# Altium PCB Layout.PcbDoc
Units mil, origin at the board's own origin, x right, y up, seen from the top; angles counter-clockwise.
Board outline 3937.01 x 492.13 mil, 2 copper layers (Top Layer, Bottom Layer), stack 61.855 mil thick; 52 components, 45 nets, 184 pads, 73 vias.
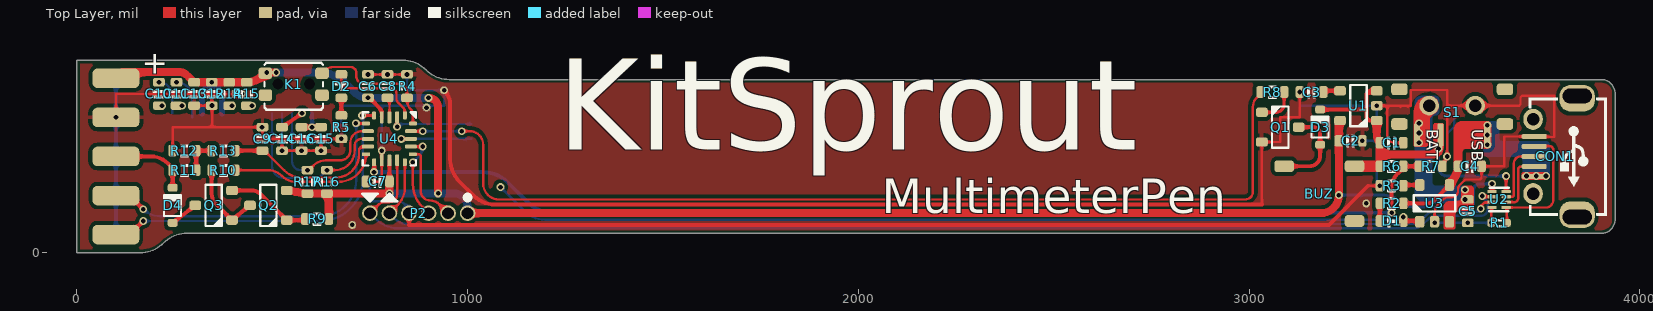
[diagram p0: Top Layer view]
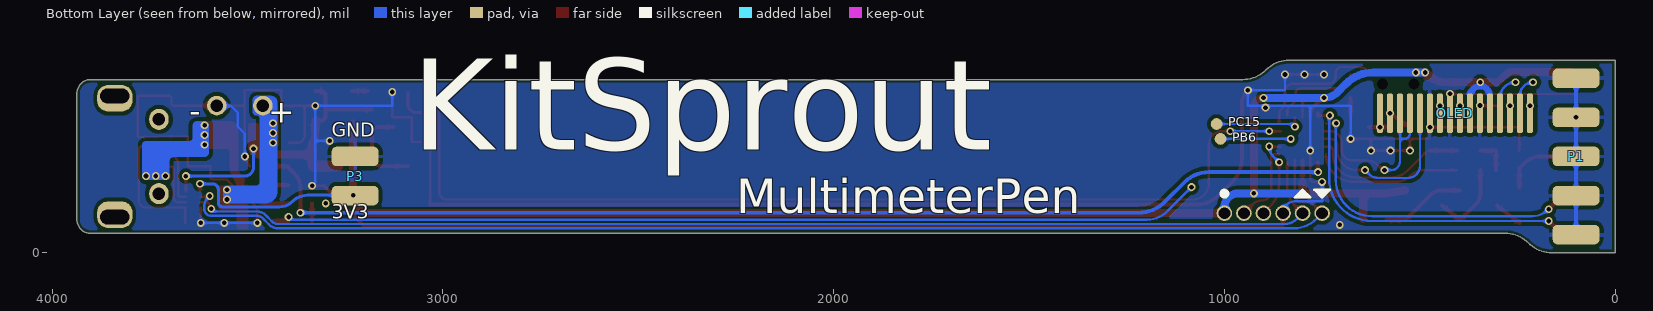
[diagram p1: Bottom Layer view, seen from below]
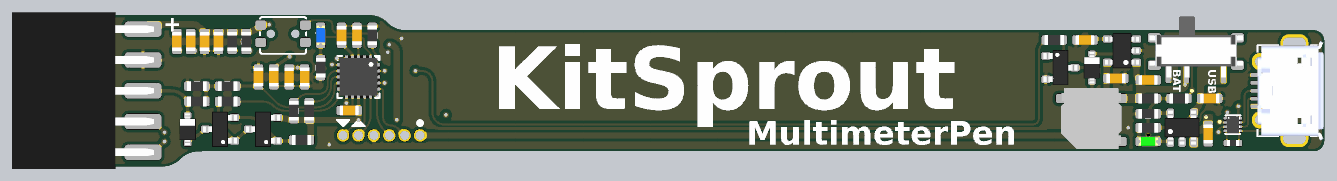
[diagram p2: 3D render of the assembled board from above, using the file's embedded part models]

## Layer stack, top to bottom
Top Solder: solder mask 0.4, Solder Resist, Dk 3.5
Top Layer: signal copper 1.4
Dielectric 1: dielectric 59.0551, FR-4, Dk 4.8
Bottom Layer: signal copper 1.4
Bottom Solder: solder mask 0.4, Solder Resist, Dk 3.5

## Board outline
0,0 0,492.13 834.34,492.13 cw(c834.34,408.11) 893.75,467.52 ccw(c953.15,526.92) 953.15,442.91 3901.57,442.91 cw(c3901.57,407.48) 3937.01,407.48 3937.01,84.65 cw(c3901.57,84.65) 3901.57,49.21 281.26,49.21 ccw(c281.26,-34.8) 221.85,24.61 cw(c162.45,84.01) 162.45,0

## Design rules (kind name [scope] priority, off if disabled: settings)
BoardOutlineClearance [All] p1: gap=10 ignorepadtopadclearanceinfootprint=FALSE except(0: Arc-SplitContinuation Track-OutlineEdge Track-SplitContinuation SMDPad-SplitContinuation THPad-SplitContinuation Via-SplitContinuation Fill-SplitContinuation Poly-SplitContinuation Region-SplitContinuation Text-SplitContinuation; 8: Arc-OutlineEdge SMDPad-OutlineEdge THPad-OutlineEdge Via-OutlineEdge Fill-OutlineEdge Poly-OutlineEdge Region-OutlineEdge Text-OutlineEdge)
Clearance ClearancePolygon [InPolygon] p1: gap=10 ignorepadtopadclearanceinfootprint=FALSE except(0: Arc-Hole Track-Hole SMDPad-Hole THPad-Hole Via-Hole Fill-Hole Poly-Hole Region-Hole Text-Hole)
Clearance [All] p2: gap=5 ignorepadtopadclearanceinfootprint=FALSE except(0: Arc-Hole Track-Hole SMDPad-Hole THPad-Hole Via-Hole Fill-Hole Poly-Hole Region-Hole Text-Hole)
ComponentClearance [All] p1: gap=0 collisioncheckmode=3 verticalgap=0 showdistances=FALSE
DiffPairsRouting [All] p1: maxlimit=10 minlimit=10 mostfreqgap=10 toplayer_minwidth=6 toplayer_maxwidth=15 toplayer_prefwidth=15 bottomlayer_minwidth=6 bottomlayer_maxwidth=15 bottomlayer_prefwidth=15 maxuncoupledlength=500
Height [All] p1: minheight=0 maxheight=5000 prefheight=500
HoleSize [All] p1: absolutevalues=TRUE maxlimit=200 minlimit=1 maxpercent=80.000 minpercent=20.000
HoleToHoleClearance [All] p1: gap=6 allowstackedmicrovias=TRUE
MinimumAnnularRing [All] p1: minimumring=4
MinimumSolderMaskSliver [All] p1: minsoldermaskwidth=0
PlaneConnect [All] p1: pad.planeconnectstyle=Relief pad.reliefexpansion=20 pad.reliefentries=4 pad.reliefconductorwidth=10 pad.reliefairgap=10 via.planeconnectstyle=Direct via.reliefexpansion=20 via.reliefentries=4 via.reliefconductorwidth=10 via.reliefairgap=10
PolygonConnect [All] p1: thpad.connectstyle=Relief thpad.reliefconductorwidth=10 thpad.reliefentries=4 thpad.polygonreliefangle="90 Angle" thpad.airgapwidth=10 smdpad.connectstyle=Relief smdpad.reliefconductorwidth=10 smdpad.reliefentries=4 smdpad.polygonreliefangle="90 Angle" smdpad.airgapwidth=10 via.connectstyle=Direct via.reliefconductorwidth=10 via.reliefentries=4 via.polygonreliefangle="90 Angle" via.airgapwidth=10
RoutingVias [All] p1: holewidth=12 width=24 viastyle="Through Hole" minholewidth=12 minwidth=20 maxholewidth=28 maxwidth=50
SMDEntry [All] p1: side=TRUE corner=TRUE anyangle=TRUE
SMDToCorner [All] p1: distance=0
SMDToPlane [All] p1: distance=0
SilkToSilkClearance [All] p1: silktosilkclearance=0
SilkToSolderMaskClearance [IsPad] p1: minsilkscreentomaskgap=0 clearancetoexposedcopper=TRUE
SolderMaskExpansion [All] p1: expansion=2 istentingtop=FALSE
UnRoutedNet [All] p1: checkbadconnections=TRUE
Width [All] p1: maxlimit=500 minlimit=6 preferedwidth=10
20 further rules are at their usual default settings.

## Components (designator, comment, footprint, x,y, rotation, side; value= is the part's Value field where it differs from the comment)
BUZ "Buzzer" Buzzer_5x5 3180,156.06 r90 top locked
C1 "C0603" CAP_0603 3365,281.06 r180 top value=1uF
C2 "C0603" CAP_0603 3260,286.06 r180 top value=1uF
C3 "C0603" CAP_0603 3160,411.06 r0 top value=22nF
C4 "C0603" CAP_0603 3565,221.06 r180 top value=1uF
C5 "C0603" CAP_0603 3560,106.06 r90 top value=1uF
C6 "C0603" CAP_0603 745,426.06 r270 top value=0.1uF
C7 "C0603" CAP_0603 770,182.06 r0 top value=0.1uF
C8 "C0603" CAP_0603 795,426.06 r270 top value=0.1uF
C9 "C0603" CAP_0603 475,291.06 r270 top value=Filter
C10 "C0603" CAP_0603 210,406.06 r270 top value=1uF
C11 "C0603" CAP_0603 255,406.06 r270 top value=1uF
C12 "C0603" CAP_0603 345,406.06 r90 top value=4.7uF
C13 "C0603" CAP_0603 300,406.06 r90 top value=0.1uF
C14 "C0603" CAP_0603 525,291.06 r90 top value=2.2uF
C15 "C0603" CAP_0603 625,291.06 r90 top value=4.7uF
C16 "C0603" CAP_0603 575,291.06 r90 top value=0.1uF
CON1 "MicroUSB" USB_Micro-AB 3830,246.06 r270 top locked value="Type B"
D1 "D0603" LED_0603_GREEN 3365,81.06 r0 top value=GREEN
D2 "D0603" LED_0603_BLUE 677,426.06 r270 top value=BLUE
D3 "1N4148" SOD-323 3182,321.06 r90 top
D4 "1N4148" SOD-323 245,121.06 r90 top
K1 "TACT" ButtonTACT_3.4*3.5_90 555,431.06 r0 top value=3.4x3.5mm
OLED "OLED_0.42_SSD1306" OLED_0.42_72x40_SSD1306_Bottom 410,336.06 r0 top locked value="0.42\" 72x40"
P1 "HDR2x5" HDR2X5_2.54_180HF 100,446.06 r180 bottom locked
P2 "HDR1x6" HDR1X6_1.27_180F 1000,101.06 r270 top locked value=1.27
P3 "HDR1x2" HDR1X2_2.54_180H 3225,146.06 r0 bottom value=2.54
Q1 "2N2222" SOT23-3 3080,321.06 r0 top
Q2 "SS8550" SOT23-3 490,121.06 r180 top
Q3 "SS8550" SOT23-3 350,121.06 r180 top
R1 "R0402" RES_0402 3640,76.06 r0 top value=10K
R2 "R0603" RES_0603 3365,126.06 r0 top value=1K
R3 "R0603" RES_0603 3365,171.06 r0 top value=2K
R4 "R0603" RES_0603 845,426.06 r270 top value=10K
R5 "R0603" RES_0603 677,321.06 r90 top value=10K
R6 "R0603" RES_0603 3365,221.06 r180 top value=10K
R7 "R0603" RES_0603 3465,221.06 r180 top value=10K
R8 "R0603" RES_0603 3060,411.06 r180 top value=2.2K
R9 "R0603" RES_0603 615,86.06 r0 top value=100R
R10 "R0603" RES_0603 375,211.06 r180 top value=2.2K
R11 "R0603" RES_0603 275,211.06 r180 top value=15K
R12 "R0603" RES_0603 275,261.06 r0 top value=2K
R13 "R0603" RES_0603 375,261.06 r180 top value=0R
R14 "R0603" RES_0603 390,406.06 r90 top value=10K
R15 "R0603" RES_0603 435,406.06 r90 top value=10K
R16 "R0603" RES_0603 640,181.06 r270 top value=4.7K
R17 "R0603" RES_0603 590,181.06 r270 top value=4.7K
S1 "SPDT" SwitchSPDT_2.8X6.6_90 3520,376.06 r180 top locked value=2.8x6.6mm
U1 "RT9193-33GB" SOT23-5 3280,376.06 r180 top value=3V3
U2 "TXS0102" SON_P0.35_8 3640,136.06 r0 top value=2-Bit
U3 "LTC4054" SOT23-5 3475,126.06 r90 top
U4 "STM32L011F4U6" QFN_P0.5_20 800,291.06 r270 top value=32MHz

## Footprints (in the part's own frame and the unit in brackets; to place one, negate y for a bottom-side part, rotate by r counter-clockwise, add the part's x,y. Pads: shape width x height; smd on the part's side, far side on the other; paste and mask are expansions set on the pad)
ButtonTACT_3.4*3.5_90 [mil]
  round 20 hole 28 unplated: 0(-40,0) 0(40,0)
  rrect50% 35x30 smd: 1(-72.5,28) 2(72.5,28) 3(-72.5,-28) NC(72.5,-28)
  silkscreen extent -75,-65 75,55
Buzzer_5x5 [mil]
  rrect50% 30x50 smd: N(65,90) NC(-75,-90) P(65,-90)
  body extent -98,-98 98,98, height 106
CAP_0603 [mil]
  rrect50% 22x30 smd: 1(-30,0) 2(30,0)
  silkscreen extent -10,-15 10,15, body extent -31,-16 31,16, height 31
HDR1X2_2.54_180H [mil]
  rrect50% 120x50 smd: 1(0,0) 2(0,-100)
  body extent -35,-150 406,50, height 61
HDR1X6_1.27_180F [mil]
  round 40 hole 30: 1(0,0) 2(0,-50) 3(0,-100) 4(0,-150) 5(0,-200) 6(0,-250)
HDR2X5_2.54_180HF [mil]
  rrect50% 120x50 smd: 1(0,0) 3(0,-100) 5(0,-200) 7(0,-300) 9(0,-400)
  rrect50% 120x50 smd far side: 2(0,0) 4(0,-100) 6(0,-200) 8(0,-300) 10(0,-400)
  body extent -36,-455 425,55, height 76
LED_0603_BLUE [mil]
  rrect50% 22x30 smd: 1(-30,0) 2(30,0)
  silkscreen extent -10,-16 10,16, body extent -32,-16 32,16, height 24
LED_0603_GREEN [mil]
  rrect50% 22x30 smd: 1(-30,0) 2(30,0)
  silkscreen extent -10,-16 10,16, body extent -32,-16 32,16, height 24
OLED_0.42_72x40_SSD1306_Bottom [mil]
  rrect50% 16x100 smd far side: 1(-191.93,20.63) 2(-166.34,20.63) 3(-140.75,20.63) 4(-115.16,20.63) 5(-89.57,20.63) 6(-63.98,20.63) 7(-38.39,20.63) 8(-12.8,20.63) 9(12.8,20.63) 10(38.39,20.63) 11(63.98,20.63) 12(89.57,20.63) 13(115.16,20.63) 14(140.75,20.63) 15(166.34,20.63) 16(191.93,20.63)
  body extent -236,-285 236,148, height 83
QFN_P0.5_20 [mil] "QFN, 20-Leads, Body 3.00x3.00mm, Pitch 0.50mm, IPC High Density"
  rrect50% 20x10 smd: 1(-60,39.37) 5(-60,-39.37) 11(60,-39.37) 15(60,39.37)
  rrect50% 30x10 smd: 2(-55,19.69) 3(-55,0) 4(-55,-19.69) 12(55,-19.69) 13(55,0) 14(55,19.69)
  rrect50% 10x20 smd: 6(-39.37,-60) 10(39.37,-60) 16(39.37,60) 20(-39.37,60)
  rrect50% 10x30 smd: 7(-19.69,-55) 8(0,-55) 9(19.68,-55) 17(19.68,55) 18(0,55) 19(-19.69,55)
  Top Layer region: -39.37,-60
  silkscreen extent -68,-68 68,68, body extent -61,-61 61,61, height 24
RES_0402 [mil]
  rrect50% 20x20 smd: 1(-20,0) 2(20,0)
  silkscreen extent -6,-10 7,10, body extent -20,-10 20,10, height 14
RES_0603 [mil]
  rrect50% 22x30 smd: 1(-30,0) 2(30,0)
  silkscreen extent -10,-16 10,16, body extent -31,-16 31,16, height 18
SOD-323 [mil]
  rrect50% 20x25 smd: 1(-45,0) 2(45,0)
  silkscreen extent -27,-22 27,22, body extent -51,-27 51,27, height 43
SON_P0.35_8 [mil] "SON, 8-Leads, Body 1.40x1.00mm, Pitch 0.35mm, IPC High Density"
  rrect50% 24x8 smd: 1(-18,20.67) 2(-18,6.89) 3(-18,-6.89) 4(-18,-20.67) 5(18,-20.67) 6(18,-6.89) 7(18,6.89) 8(18,20.67)
  Top Layer region: -18,20.67
  silkscreen extent -25,-30 25,30, body extent -23,-29 23,29, height 16
SOT23-3 [mil]
  rrect50% 30x24 smd: 1(-47,38) 2(-47,-38) 3(47,0)
  silkscreen extent -21,-53 21,53, body extent -55,-57 55,57, height 51
SOT23-5 [mil]
  rrect50% 30x24 smd: 1(-47,38) 2(-47,0) 3(-47,-38) 4(47,-38) 5(47,38)
  silkscreen extent -21,-53 21,53, body extent -55,-57 55,57, height 57
SwitchSPDT_2.8X6.6_90 [mil]
  rrect50% 42x30 smd: 0(-135,-42) 0(-135,47) 0(135,-42) 0(135,47)
  round 50 hole 32: 0(-59.06,0) 0(59.06,0)
  rrect50% 16x60 smd: 1(90,75) 2(30,75) 3(-90,75)
  body extent -152,-111 151,86, height 55
USB_Micro-AB [mil]
  rrect80% 68x90 hole 37 slot 75 at 90 deg copper offset 6,0 mask+0: 0(-155,10)
  oval 54x50 hole 32 mask+0: 0(-95,-103) 0(95,-103)
  rrect80% 68x90 hole 37 slot 75 at 90 deg copper offset -6,0 mask+0: 0(155,10)
  rrect50% 12x64 smd: 1(51.18,-100) 2(25.59,-100) 3(0,-100) 4(-25.59,-100) 5(-51.18,-100)
  silkscreen extent -151,-113 151,86, body extent -161,-109 161,104, height 108

## Part data
C1 C2 C3 C4 C5 C6 C7 C8 C9 C10 C11 C12 C13 C14 C15 C16: library part Cap_0603, "Capacitor", Note=±10%, Specification="X7R, ±10%, 16V", Type=0603
CON1: library part USB_Micro, "USB"
D1 D2: library part LED_0603, "LED", Type=0603
D3 D4: library part Diode_SOD323, "Diode", Type=SOD323
K1: library part ButtonTACT_90_3.4x3.5, "Button", Link=https://item.taobao.com/item.htm?spm=a1z0d.6639537.1997196601.53.23d65886vmE4xA&id=524943251643, Type="TACT 4P"
OLED: "OLED", Link=https://item.taobao.com/item.htm?spm=a1z09.2.0.0.4fdb2e8dEz3Swn&id=556201228621&_u=ik3v2nv8c8e, Note=SSD1306, Specification=0.65mm, Type=FPC16
P1: library part HDR2x5_2.54, "Header"
P2: library part HDR1x6_1.27T, "Header", Type="DIP 1x6"
P3: library part HDR1x2_2.54, "Header", Type="DIP 1x2"
Q1: library part BJT_NPN, "Transistor", Note=NPN, Type=SOT32-3
Q2: library part BJT_PNP, "Transistor", Note=PNP, Type=SOT32-3
Q3: library part BJT_PNP_T, "Transistor", Note=PNP, Type=SOT32-3
R1: library part Res_0402, "Resistor", Note=±1%, Specification=±1%, Type=0402
R2 R3 R4 R5 R6 R7 R8 R9 R10 R11 R12 R13 R14 R15 R16 R17: library part Res_0603, "Resistor", Note=±1%, Specification=±1%, Type=0603
S1: library part SwitchSPDT_90_2.8x6.6, "Switch", Type="SPDT 3P"
U1: library part RT9193, "Power", Type=SOT23-5
U2: "Level Shifter", Manufacturer="Texas Instruments", ComponentLink1Description=Datasheet, ComponentLink1URL=https://www.ti.com/lit/ds/symlink/txs0102.pdf?&ts=1589954619766, Type=SON8
U3: "Battery Charger", Type=SOT23-5
U4: library part STM32L011F, "MCU ST", Manufacturer=STMicroelectronics, Datasheet=https://www.st.com/resource/en/datasheet/stm32f030f4.pdf, Note=CortexM0, Specification="16K Flash,2K SRAM", Type=TSSOP20
BUZ: Link=https://item.taobao.com/item.htm?spm=a1z0d.6639537.1997196601.13.23d65886vmE4xA&id=599696064098, Type=SMD3

## Free pads (board coordinates)
  round 30 smd far side: 2(1010,291.06) 2(1020,329.06)

## Via types
v1: diameter 20, hole 12, Top Layer to Bottom Layer, tented both sides, 73 vias

## Nets (pads, with @x,y where several pads share a name; then routed paths per layer and width w, separated by ;. In a path a pad name is that pad's centre, name@x,y a point inside that pad or via, vN(x,y) a via of type N, cw(c..) or ccw(c..) an arc to the next point about the centre after c; other vN are vias at no path point)
+3V3: C2.2 C6.2 C7.2 C12.2 C13.2 K1.1 OLED.5 OLED.7 P1.2 P2.1 P3.1 Q2.2 R9.2 R14.2 R15.2 R16.2 R17.2 U1.5 U2.1 U4.4 U4.13 | length 4938.9
  Top Layer w8: C7.2@800,181.06 C7.2 ; U2.1 v1@3622,181.73
  Top Layer w10: v1(745,396.06) 749,396.06 773.5,371.56 cw(c757.05,355.11) 780.31,355.11 U4.4 ; C7.2 U4.13
  Top Layer w20: P1.2 116,462.06 264.5,462.06 cw(c264.5,441.56) 278.1,456.9 287,449.06 C13.2 v1(345,436.06) R14.2 R15.2 ccw(c435,495.21) 476.82,453.39 K1.1 482.5,461.06 v1(486.25,461.06) v1(510,461.06) ; Q2.2@539,161.06 Q2.2 R17.2 ; R17.2@590,151.14 799.92,151.14 v1(800,151.06) C7.2@800,181.06 ; R16.2 644.92,146.14 R9.2@644.92,86.06 ; v1(900,396.06) cw(c900,371.56) 924.5,371.56 v1(924.5,151.56) ; P2.1 3184,101.06 ccw(c3184,147.06) v1(3230,147.06) C2.2 U1.5@3230,330.82
  Bottom Layer w8: v1(3230,147.06) 3346.58,147.06 cw(c3346.58,92.92) 3384.81,131.25 3384.91,131.15 ccw(c3419,165.35) 3419,117.06 3427.29,117.06 3556.73,117.06 3560.87,117.06 3564.64,117.06 ccw(c3564.64,127.43) 3575,127.43 3575,161.06 cw(c3590,161.06) 3590,176.06 v1(3622,176.06)
  Bottom Layer w16: OLED.5 320.43,401.5 cw(c345,401.5) 345,426.06 ; v1(345,436.06) 345,426.06 ; OLED.7 371.61,399.45 ccw(c345,399.45) 345,426.06
  Bottom Layer w20: v1(486.25,461.06) v1(510,461.06) 618.58,461.06 cw(c618.58,361.06) 689.29,431.77 710.15,410.91 ccw(c746,446.76) 746,396.06 v1(900,396.06) ; v1(800,151.06) 800.5,151.56 v1(924.5,151.56) 964.5,151.56 cw(c964.5,116.06) 1000,116.06 P2.1
+VBAT: C5.2 S1.0@3460.94,376.06 S1.1 U3.3 | length 143.6
  Top Layer w10: S1.1 3430,345.12 S1.0@3460.94,376.06
  Bottom Layer w10: v1(3435,331.06) 3436.91,332.98 3436.91,343.53 3460.94,367.56 S1.0@3460.94,376.06
  other v1: 3553,136.06 3553,161.06 3435,281.06 3435,306.06
+VBUS: C4.2 CON1.1 R2.2 S1.3 U3.4 | length 374.8
  Top Layer w10: R2.2 3456.1,126.06 ccw(c3456.1,149.96) 3473,133.06 U3.4 ; v1(3610,276.06) v1(3610,301.06)
  Top Layer w20: U3.4@3517.97,181.04 ccw(c3476.06,223.06) 3535.35,220.23 ccw(c3476.06,223.06) C4.2@3535.41,223.06 ; C4.2 C4.2@3535.41,220.06
  Bottom Layer w10: v1@3611.91,274.15 3691.91,274.15 3710,256.06 v1(3710,196.06)
  other v1: 3735,196.06 3760,196.06 3610,326.06
+VIN: BUZ.P C1.2 D3.2 R6.2 S1.2 U1.1 U1.3 U2.8 | length 826.1
  Top Layer w8: U2.8 v1(3658,195.73)
  Top Layer w10: D3.2 3300,366.06 ; U1.1 3311.88,338.06 cw(c3311.88,349.37) 3300.58,349.37 3300.58,401.64 cw(c3313,401.64) 3313,414.06 U1.3
  Top Layer w20: U1.1 3327,300.38 ccw(c3354.31,300.38) C1.2 3335,251.06 ; R6.2 3335,251.06 ; 3469,251.06 3335,251.06
  Top Layer w28: BUZ.P R6.2@3332,221.06
  Bottom Layer w8: v1(3484.93,266.13) 3484.93,218.36 ccw(c3507.56,218.36) 3507.56,195.73 v1(3658,195.73) ; v1@3487.93,267.13 v1@3489,266.06
BATT: R6.1 R7.2 U4.11 | length 2826.8
  Top Layer w10: v1(760.63,206.06) U4.11 ; v1@3365,105.06 3365,165.85 cw(c3416.21,165.85) 3379.99,202.05 R6.1@3395,217.06 ; R6.1 R7.2
  Bottom Layer w10: v1(760.63,206.06) 1040,206.06 cw(c1040,119.15) 1101.46,180.61 1151.72,130.35 ccw(c1220,198.63) 1220,102.06 v1(3365,102.06)
D+: CON1.2 U2.6 | length 156
  Top Layer w6: U2.6 3678.81,129.17 ccw(c3678.81,139.36) 3689,139.36 3689,213.55 cw(c3695.92,213.55) 3695.92,220.47 CON1.2
D-: CON1.3 U2.7 | length 165.9
  Top Layer w6: U2.7 3673.49,142.95 ccw(c3673.49,147.47) 3678,147.47 3678,229.06 cw(c3695,229.06) 3695,246.06 CON1.3
GND: C1.1 C2.1 C3.1 C4.1 C5.1 C6.1 C7.1 C8.1 C9.1 C12.1 C13.1 C14.1 C15.1 C16.1 CON1.5 OLED.6 OLED.9 OLED.11 P1.1 P1.3 P1.4 P1.5 P1.7 P1.9 P2.4 P3.2 Q1.2 R1.1 R3.1 R4.1 R5.1 R7.1 R12.1 S1.0@3579.06,376.06 U1.2 U2.4 U3.2 U4.12 | length 10158.5
  Top Layer w6: v1(100,346.06) 100,406.06 345,406.06 ; R12.1 245,321.06 346.02,321.06 ; C13.1 C12.1 345,406.06 ; C12.1@346.02,376.06 346.02,321.06 ; v1@422.8,406.06 345,406.06 ; v1(473.98,321.06) 346.02,321.06 ; C9.1 475,291.06 525,291.06 ; R5.1@680,291.06 v1(677,291.06) 625,291.06 ; C7.1@740,181.06 v1(750,181.06) 772,181.06 ccw(c772,189.38) 780.31,189.38 U4.12 v1(780.31,261.06) ; v1(745,456.06) v1(795,456.06) v1(845,456.06) ; 850,71.06 P2.4 ; 3033,123.06 Q1.2 3080,283.06 3080,346.06 3130,346.06 v1(3130,411.06) ; 3305,171.06 v1(3335,171.06) ; v1(3327,376.06) 3354,376.06 ; C1.1 3373.31,281.06 cw(c3373.31,300.38) 3354,300.38 3354,376.06 ; U3.2 3475,99.89 cw(c3510.42,99.89) 3485.35,124.91 ; 3485.37,124.94 3495.75,135.31 cw(c3512.04,119.02) 3512.04,142.06 3519.12,142.06 ccw(c3519.12,157.91) 3534.97,157.91 3534.97,163.2 cw(c3547.74,163.2) 3538.71,172.24 3553.54,187.06 3591.49,187.06 3595,190.58 C4.1 3653,221.06 3653,297.24 CON1.5 3730,296.06 3781,296.06 3781,401.06 3698.51,401.06 3695,397.55 3695,379.58 3691.49,376.06 3579.06,376.06 3507,376.06 ; R7.1 v1(3507,246.06) 3507,376.06 ; v1(3620,76.06) U2.4@3620,115.39 ; 525,291.06 625,291.06 ; 525,291.06 v1(525,261.06) v1(575,261.06) v1(625,261.06) 625,291.06 ; 3354,376.06 3414,376.06 3414,416.06 3507,416.06 3507,376.06
  Top Layer w10: 850,71.06 3205,71.06 3305,171.06 ; v1(940,415.75) cw(c903.79,379.53) 955,379.53 955,241.06 ccw(c1039.5,241.06) 979.72,181.34 ; 979.75,181.31 1015,146.06 ccw(c1070.53,201.59) 1070.5,123.06 ; 1070.53,123.06 1075,123.06 3033,123.06
  Bottom Layer w6: v1(677,291.06) 677,376.06 780.31,376.06 ; v1(750,181.06) 750,131.06 820,131.06 cw(c820,101.06) P2.4 ; v1(780.31,261.06) 780.31,376.06 ; v1(845,456.06) 845,415.75 v1(940,415.75) 940,376.06 780.31,376.06 ; v1(3130,411.06) 3130,376.06 v1(3327,376.06) 3327,286.06 ; v1(3290,286.06) 3327,286.06 ; v1(3335,171.06) 3327,179.06 3327,286.06 ; v1(3475,76.06) v1(3560,76.06) v1(3620,76.06) ; v1(3507,246.06) 3507,304.01 3525.01,322.02 3525.01,358.05 3542.1,375.14 3578.13,375.14 S1.0@3579.06,376.06
  Bottom Layer w10: P1.9 P1.7 P1.5 v1(100,346.06) P1.1 ; P2.4@850,96.06 P2.4
  other v1: 705,71.06 3300,126.06 895,371.06 346.02,376.69 422.8,406.69
ID: CON1.4 R1.2 U2.5 | length 353.2
  Top Layer w6: U2.5 3759.33,115.39 ccw(c3759.33,135.06) 3779,135.06 3779,262.06 ccw(c3768,262.06) 3768,273.06 3733.9,273.06 ccw(c3733.86,267.06) CON1.4 ; R1.2 U2.5@3660,114.39
KEY: K1.2 R4.2 U4.20 | length 348
  Top Layer w6: K1.2 635.37,466.93 cw(c655,447.3) 643.51,472.57 cw(c655,447.3) 655,475.06 700.09,475.06 cw(c700.09,460.15) 715,460.15 715,452.06 ccw(c735,452.06) 735,432.06 770,432.06 824.98,432.06 cw(c824.98,412.04) 845,412.04 R4.2 845,390.21 ccw(c879.14,390.21) 855,366.06 cw(c842.93,353.99) 860,353.99 U4.20
LED: D2.1 U4.1 | length 241.9
  Top Layer w6: D2.1 677,440.32 ccw(c696.33,440.32) 695.84,420.99 ; 703.84,420.99 ccw(c704.33,440.32) 704.33,420.99 698.84,420.99 804.71,420.44 804.77,420.44 cw(c804.71,407.15) 818,407.15 818,395.11 ccw(c835.01,395.11) 822.98,383.08 835,371.06 cw(c824.45,360.51) 839.37,360.51 U4.1
NetBUZ_N: BUZ.N D3.1 Q1.3 | length 228.1
  Top Layer w10: BUZ.N 3155,221.06 ccw(c3155,248.06) 3182,248.06 D3.1 3182,304.06 ccw(c3165,304.06) 3165,321.06 Q1.3
NetC3_2: C3.2 U1.4 | length 40
  Top Layer w10: C3.2@3193,414.06 U1.4
NetC10_1: C10.1 OLED.2 | length 98.6
  Bottom Layer w6: v1(210,436.06) cw(c210,402.4) 243.66,402.4 OLED.2
NetC10_2: C10.2 OLED.1
  other v1: 218.07,376.06
NetC11_1: C11.1 OLED.4 | length 112.1
  Bottom Layer w6: v1(255,436.06) cw(c255,396.22) 256.9,436.02 cw(c255,396.22) 294.8,398.12 cw(c255,396.22) 294.84,396.22 OLED.4 OLED.4@294.84,346.69
NetC11_2: C11.2 OLED.3
  other v1: 269.25,376.06
NetC14_2: C14.2 OLED.15 | length 62.5
  Top Layer w10: C14.2 v1(576.34,356.69)
NetC15_2: C15.2 C16.2 OLED.16 | length 87.6
  Top Layer w10: C16.2 C15.2@630,321.06
  Bottom Layer w10: OLED.16@601.93,324.06 OLED.16
  other v1: 601.93,321.06
NetD1_1: D1.1 R2.1 | length 45
  Top Layer w10: D1.1 R2.1
NetD1_2: D1.2 U3.1 | length 2384.9
  Top Layer w10: D1.2 3432.17,81.06 cw(c3432.17,74.23) U3.1
  Bottom Layer w6: v1(1084,167.61) 1145.27,106.34 ccw(c1199.04,160.11) 1199.02,84.06 ; 1199.04,84.06 1210,84.06 v1@3395,84.06
  other v1: 3395,91.06
NetD2_2: D2.2 R5.2 | length 45
  Top Layer w10: R5.2 D2.2
NetD4_1: D4.1 Q3.3 | length 73.4
  Top Layer w10: D4.1 Q3.3
NetOLED_8: OLED.8 R14.1
  other v1: 397.2,376.06
NetOLED_10: OLED.10 R15.1
  other v1: 448.39,376.06
NetQ1_1: Q1.1 R8.1 | length 99.9
  Top Layer w8: Q1.1 3068.75,359.06 ccw(c3068.75,380.32) 3090,380.32 R8.1
NetQ2_1: Q2.1 Q3.2 R9.1 | length 218.1
  Top Layer w10: Q3.2 447.69,159.06 447.76,159.06 cw(c447.76,127.09) 470.34,149.72 470.42,149.65 Q2.1 R9.1@585,83.06
NetQ2_3: Q2.3 Q3.1 R10.2 | length 207.6
  Top Layer w10: R10.2 345,150.27 345,150.2 ccw(c381.56,150.2) 355.71,124.36 355.76,124.3 Q3.1 Q2.3
NetR3_2: R3.2 U3.5 | length 42.5
  Top Layer w10: R3.2 cw(c3399.83,166.23) 3399.83,173.06 U3.5
NetR11_1: R11.1 R12.2 R13.2 | length 90
  Top Layer w10: R11.1 R12.2 R13.2
OLED_SCL: OLED.12 R16.1 U4.8 | length 455.8
  Top Layer w6: v1(640,211.06) 660.47,211.06 ccw(c660.47,261.59) 711,261.59 711,274.06 cw(c728,274.06) 728,291.06 U4.8
  Bottom Layer w6: OLED.12 499.57,221.5 ccw(c530,221.5) 530,191.06 605.86,191.06 ccw(c605.86,225.21) 629.98,201.04 v1(640,211.06)
OLED_SDA: OLED.13 OLED.14 R17.1 U4.7 | length 474.5
  Top Layer w6: v1(590,211.06) 594,211.06 606.5,223.56 cw(c636.68,193.39) 636.68,236.06 673.78,236.06 ccw(c673.78,262.28) 700,262.28 700,281.41 cw(c729.34,281.41) 729.34,310.75 U4.7
  Bottom Layer w6: OLED.13 525,356.54 525,306.06 ccw(c540,306.06) 540,291.06 550.75,291.06 ; OLED.14 550.75,291.06 ; v1(590,211.06) 573.43,211.06 cw(c573.43,233.74) 550.75,233.74 550.75,291.06
PB6: pad.2@1010,291.06 U4.18 | length 205
  Top Layer w6: v1(830,291.06) U4.18
  Bottom Layer w6: v1(830,291.06) pad.2@1010,291.06
PC15: pad.2@1020,329.06 U4.2 | length 215
  Top Layer w6: v1@819.69,321.06 v1(819.69,322.06) U4.2
  Bottom Layer w6: v1@820,329.06 pad.2@1010,329.06
PROBE_CH: D4.2 P1.6 R11.2 | length 199.8
  Top Layer w10: P1.6 190,246.06 cw(c190,185.71) 232.68,228.39 R11.2@245,216.06 ; D4.2 R11.2
PROBE_E1: P1.8 U4.6 | length 857.4
  Top Layer w6: v1@715,330.43 U4.6
  Top Layer w10: P1.8 135,146.06 v1(170,111.06)
  Bottom Layer w6: v1(170,111.06) ccw(c213.46,154.52) 213.46,93.06 ; 213.5,93.06 622,93.06 ccw(c622,186.06) 715,186.06 v1@715,331.06
  other v1: 714,331.06
PROBE_E2: P1.10 U4.5 | length 900.3
  Top Layer w6: v1@735,351.06 U4.5
  Top Layer w10: P1.10 135,46.06 v1(170,81.06) ; U4.5 U4.5@760.63,356.06
  Bottom Layer w6: v1(170,81.06) 622.99,81.06 ccw(c622.99,190.07) 732,190.07 v1@732,351.06
  other v1: 730,351.06
PROBE_I: C9.2 R13.1 U4.9 | length 405.3
  Top Layer w6: C9.2@483.54,257.53 530.62,210.45 ccw(c575,254.83) 575,192.06 662.63,192.06 ccw(c662.63,251.43) 722,251.43 722,261.06 cw(c732.31,261.06) 732.31,271.38 U4.9
  Top Layer w10: R13.1 C9.2
PROBE_O: R10.1 U4.10 | length 383.3
  Top Layer w6: R10.1 488.79,211.06 cw(c488.79,159.85) 524.99,196.07 ccw(c561.21,232.28) 561.21,181.06 669.37,181.06 ccw(c669.37,251.69) U4.10
PWM: R8.2 U4.19 | length 2570.9
  Top Layer w6: U4.19 v1(885,310.75) ; v1(985,310.75) 1005.31,310.75 cw(c1005.31,276.06) 1040,276.06 1040,176.06 ccw(c1080,176.06) 1080,136.06 2990,136.06 ccw(c2990,156.06) 3010,156.06 3010,372.92 cw(c3044.14,372.92) 3019.98,397.04 3030,407.06 R8.2
  Bottom Layer w6: v1(885,310.75) v1(985,310.75)
RST: C8.2 U4.3 | length 52.1
  Top Layer w6: C8.2 800,391.06 U4.3
SWCLK: P2.3 U4.17 | length 222.2
  Top Layer w6: U4.17 v1(885,271.38) ; v1(860,231.06) 860,174.73 ccw(c941.29,174.73) 883.81,117.25 P2.3
  Bottom Layer w6: v1(860,231.06) 874.17,245.23 ccw(c848.03,271.38) v1(885,271.38)
SWDIO: P2.2 U4.16 | length 207.5
  Top Layer w6: U4.16 874.37,251.69 cw(c874.37,246.06) 880,246.06 880,157.7 ; 880,157.65 ccw(c904.17,157.65) 904.21,133.48 cw(c904.17,101.09) 927.07,123.99 P2.2
UART_RX: P2.5 U2.3 U4.15 | length 2995.4
  Top Layer w6: P2.5 821.56,122.63 ccw(c778.58,165.62) 839.37,165.62 U4.15 ; v1(3593,112.06) cw(c3610.11,112.06) 3610.11,129.17 U2.3
  Bottom Layer w6: P2.5 815,86.06 ccw(c846.38,117.45) 846.38,73.06 880,73.06 3421,73.06 ccw(c3421,97.18) 3438.05,80.13 3454.49,96.57 cw(c3475,76.06) 3475,105.06 v1@3592.25,105.06
UART_TX: P2.6 U2.2 U4.14 | length 3136.2
  Top Layer w6: P2.6 770.32,121.38 ; 770.33,121.39 cw(c788.86,102.83) 788.86,129.06 799.73,129.06 ccw(c799.73,149.02) 799.82,129.06 ccw(c799.73,149.02) 799.93,129.06 ccw(c799.73,149.02) 800.18,129.07 ccw(c799.73,149.02) 800.27,129.07 ccw(c799.73,149.02) 819.68,149.02 U4.14 ; v1@3597,142.95 U2.2
  Bottom Layer w6: P2.6 765,86.06 ccw(c822.94,144) 822.94,62.06 3421.12,62.06 ccw(c3421.12,97.24) 3446,72.37 3462.21,88.73 cw(c3475,76.06) 3475,94.06 3593.5,94.06 ccw(c3593.5,111.56) 3611,111.56 3611,118.06 ccw(c3579.62,118.06) 3601.81,140.26 v1(3597,145.06)
pads on no net: BUZ.NC CON1.0 K1.0 K1.3 K1.NC S1.0@3385,329.06 S1.0@3385,418.06 S1.0@3655,329.06 S1.0@3655,418.06

## Polygon pours and split planes (outlines as drawn)
GND on Top Layer "GND_L01_P000" (solid, remove dead copper, pour order 0): 0,0 0,492.13 834.34,492.13 cw(c834.34,408.11) 893.75,467.52 ccw(c953.15,526.92) 953.15,442.91 3901.57,442.91 cw(c3901.57,407.48) 3937.01,407.48 3937.01,84.65 cw(c3901.57,84.65) 3901.57,49.21 281.26,49.21 ccw(c281.26,-34.8) 221.85,24.61 cw(c162.45,84.01) 162.45,0
GND on Bottom Layer "GND_L02_P001" (solid, remove dead copper, pour order 1): 0,0 0,492.13 834.34,492.13 cw(c834.34,408.11) 893.75,467.52 ccw(c953.15,526.92) 953.15,442.91 3901.57,442.91 cw(c3901.57,407.48) 3937.01,407.48 3937.01,84.65 cw(c3901.57,84.65) 3901.57,49.21 281.26,49.21 ccw(c281.26,-34.8) 221.85,24.61 cw(c162.45,84.01) 162.45,0

## Other copper
Top Layer:
  region net +VIN: 3472,326.06 3472,271.06 cw(c3462,271.06) 3462,261.06 3413,261.06 3413,241.06 3471,241.06 ccw(c3471,268.06) 3498,268.06 3498,327.06 ccw(c3494,327.06) 3494,331.06 3477,331.06 ccw(c3477,326.06)
  region net +VBUS: 3698,201.06 3698,191.06 ccw(c3703,191.06) 3703,186.06 3757,186.06 ccw(c3757,191.06) 3762,191.06 3762,201.06 ccw(c3757,201.06) 3757,206.06 3703,206.06 ccw(c3703,201.07)
  region net +VBUS: 3610,336.06 3544,336.06 ccw(c3543.99,316.07) 3524,316.06 3524,219.06 3546,219.06 3546,256.06 cw(c3556,256.06) 3556,266.06 3610,266.06 ccw(c3610,276.06) 3620,276.06 3620,326.06 ccw(c3610,326.06)
  region net +VBAT: 3461,401.06 cw(c3461,376.06) 3486,376.06 cw(c3461.49,375.77) 3472.97,354.12 ccw(c3481.76,336.42) 3462,336.7 3462,281.06 cw(c3452,281.06) 3452,271.06 3426,271.06 cw(c3426,275.06) 3422,275.06 3422,362.06 cw(c3461,362.06)
  region net +VBAT: 3574.99,163.06 3575,116.32 cw(c3565.75,116.31) 3565.75,107.06 3538,107.06 ccw(c3538,97.07) 3528,97.06 3528,65.06 cw(c3523,65.06) 3523,60.06 3503,60.06 cw(c3503,65.06) 3498,65.06 3498,116.06 cw(c3514,116.06) 3514,132.06 3533,132.06 ccw(c3533,142.06) 3543,142.06 3543,161.06 cw(c3553,161.06) 3553,171.06 3567,171.06 cw(c3567,163.07)
Bottom Layer:
  region net +VBAT: 3477,351.06 ccw(c3477,343.06) 3469,343.06 3469,181.06 ccw(c3479,181.06) 3479,171.06 3553,171.06 cw(c3553,161.07) 3563,161.06 3563,136.06 cw(c3553,136.06) 3553,126.06 3455,126.06 cw(c3455,157.06) 3424,157.07 3424,386.06 cw(c3439,386.06) 3439,401.06 3477,401.06 cw(c3477,391.06) 3487,391.06 3487,361.06 cw(c3477,361.06)
  region net +VBUS: 3640,326.07 3640,295.06 ccw(c3650,295.06) 3650,285.06 3760,285.06 cw(c3760,275.07) 3770,275.06 3770,196.06 cw(c3760,196.06) 3760,186.06 3710,186.06 cw(c3710,196.06) 3700,196.06 3700,235.06 ccw(c3690,235.06) 3690,245.06 3610,245.06 cw(c3610,255.06) 3600,255.06 3600,326.06 cw(c3610,326.06) 3610,336.06 3630,336.06 cw(c3630,326.06)

## Silkscreen, mask and mechanical layers (free items; w line width, h text height)
Top Overlay:
  circle w15: c1000,141.06 r5
  region: 800,151.06 780,131.06 820,131.06
  region: 750,131.06 770,151.06 730,151.06
  lines w6: 730,151.06 750,131.06 770,151.06 730,151.06 ; 780,131.06 820,131.06 800,151.06 780,131.06
  text "+" at 166,439.06 h100
  text "BAT" at 3445,316.06 h50 r270
  text "USB" at 3560,316.06 h50 r270
  text "KitSprout" at 1230,186.06 h400
  text "MultimeterPen" at 2060,71.06 h150
Bottom Overlay:
  circle w15: c1000,151.06 r5
  region: 800,161.06 780,141.06 820,141.06
  region: 750,141.06 770,161.06 730,161.06
  lines w6: 730,161.06 770,161.06 750,141.06 730,161.06 ; 780,141.06 820,141.06 800,161.06 780,141.06
  text "+" at 3380,401.06 h100 r180
  text "-" at 3620,398.06 h100 r180
  text "PC15" at 990,316.06 h40
  text "GND" at 3285,285.47 h60
  text "PB6" at 980,276.06 h40
  text "KitSprout" at 3080,186.06 h400
  text "3V3" at 3285,75.57 h60
  text "MultimeterPen" at 2250,71.06 h150
Mechanical 1:
  lines w2: 0,0 162.45,0 ccw(c162.45,84.01) 221.85,24.61 cw(c281.26,-34.8) 281.26,49.21 3901.57,49.21 ccw(c3901.57,84.65) 3937.01,84.65 3937.01,407.48 ccw(c3901.57,407.48) 3901.57,442.91 953.15,442.91 cw(c953.15,526.92) 893.75,467.52 ccw(c834.34,408.11) 834.34,492.13 0,492.13 0,0
Mechanical 2:
  circle w2: c3727,151.06 r16
  circle w2: c3727,341.06 r16
  circle w2: c3579.06,376.06 r16
  circle w2: c3460.94,376.06 r16
  circle w2: c950,101.06 r15
  circle w2: c1000,101.06 r15
  circle w2: c900,101.06 r15
  circle w2: c850,101.06 r15
  circle w2: c800,101.06 r15
  circle w2: c750,101.06 r15
  circle w2: c595,431.06 r14
  circle w2: c515,431.06 r14
  lines w2: 510,431.06 520,431.06 ; 515,426.06 515,436.06 ; 590,431.06 600,431.06 ; 595,426.06 595,436.06 ; 745,101.06 755,101.06 ; 750,96.06 750,106.06 ; 795,101.06 805,101.06 ; 800,96.06 800,106.06 ; 845,101.06 855,101.06 ; 850,96.06 850,106.06 ; 895,101.06 905,101.06 ; 900,96.06 900,106.06 ; 945,101.06 955,101.06 ; 950,96.06 950,106.06 ; 995,101.06 1005,101.06 ; 1000,96.06 1000,106.06 ; 3455.94,376.06 3465.94,376.06 ; 3460.94,371.06 3460.94,381.06 ; 3574.06,376.06 3584.06,376.06 ; 3579.06,371.06 3579.06,381.06 ; 3722,151.06 3732,151.06 ; 3722,341.06 3732,341.06 ; 3727,146.06 3727,156.06 ; 3727,336.06 3727,346.06 ; 3835,91.06 3845,91.06 ; 3835,401.06 3845,401.06 ; 3840,86.06 3840,96.06 ; 3840,396.06 3840,406.06 ; -350,-53.94 -350,646.06 4287.01,646.06 4287.01,-53.94 -350,-53.94 ; 0,0 162.45,0 ccw(c162.45,84.01) 221.85,24.61 cw(c281.26,-34.8) 281.26,49.21 3901.57,49.21 ccw(c3901.57,84.65) 3937.01,84.65 3937.01,407.48 ccw(c3901.57,407.48) 3901.57,442.91 953.15,442.91 cw(c953.15,526.92) 893.75,467.52 ccw(c834.34,408.11) 834.34,492.13 0,492.13 0,0 ; 3821,72.56 cw(c3821,91.06) 3821,109.56 3859,109.56 cw(c3859,91.06) 3859,72.56 3821,72.56 ; 3821,382.56 cw(c3821,401.06) 3821,419.56 3859,419.56 cw(c3859,401.06) 3859,382.56 3821,382.56

## Dimensions
281.26,-34.8 to 266.49,-20.04 on Mechanical 2
834.34,492.13 to 281.26,49.21 on Mechanical 2
3901.57,442.91 to 3901.57,49.21 on Mechanical 2
0,492.13 to 55,-3.94 on Mechanical 2
0,492.13 to 3937.01,407.48 on Mechanical 2

## Panel: embedded boards
"Layout.PcbDoc" at 4300,-3893.94, 1 rows x 1 columns, spacing 2500 x 1500, rotation 0
"Layout.PcbDoc" at -360,-3123.94, 1 rows x 1 columns, spacing 2500 x 1500, rotation 0
"Layout.PcbDoc" at -360,-1583.94, 1 rows x 1 columns, spacing 2500 x 1500, rotation 0
"Layout.PcbDoc" at 4300,-2353.94, 1 rows x 1 columns, spacing 2500 x 1500, rotation 0
"Layout.PcbDoc" at -360,-813.94, 1 rows x 1 columns, spacing 2500 x 1500, rotation 0